# EAGLE board Adc (EAGLE 6.2)
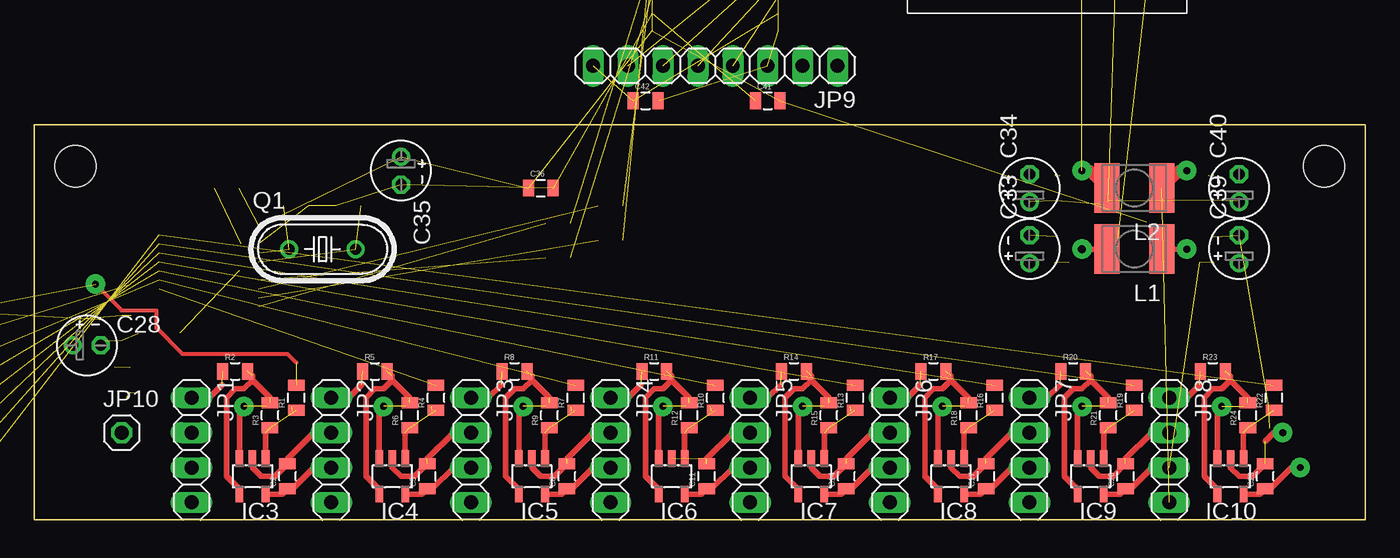
[diagram p0: board, top side]
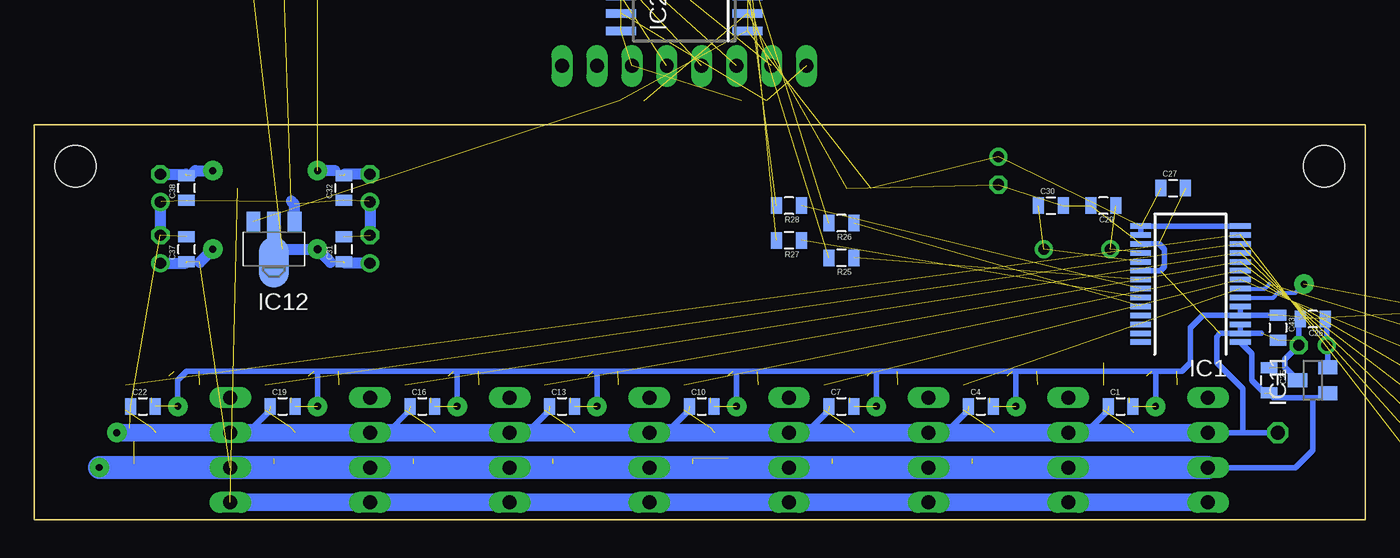
[diagram p1: board, bottom side, seen from below]

Size 96.8 x 28.72 mm. Coordinates in mm from the lower left corner, seen from the top.
Outline: 0,0 96.8,0 96.8,28.72 0,28.72 0,0
Copper layers (1*16): Top 0.035mm / dielectric 1.5mm / Bottom 0.035mm
Design rules: minimum track width 10mil, minimum drill 24mil, track to track 8mil, track to pad 8mil, pad to pad 8mil, via to via 8mil, smd to smd 8mil, copper to edge 40mil, drill to drill 8mil, minimum pad ring 10mil, minimum via ring 8mil, stop-mask expansion 4mil, vias tented up to drill 0mil, thermal gap 10mil
Holes 3 mm at 3,25.72 93.8,25.72

## Footprints (pad centres in the part's own frame; a part is rotated, then mirrored left to right if it is on the bottom)
0805 = smd 0.8 x 1.2: 1 -0.9,0; 2 0.9,0
E2-4 = drill 0.813 pad 1.27: + -1.016,0 | drill 0.813 pad 1.27 octagon: - 1.016,0
TMV0505D = drill 0.6 pad 1.422 long: 1 0,7.62; 2 0,5.08; 5 0,-2.54; 6 0,-5.08; 7 0,-7.62
ADS1256IDBT = smd 0.4 x 1.5: 1 -4.225,-3.625; 2 -3.575,-3.625; 3 -2.925,-3.625; 4 -2.275,-3.625; 5 -1.625,-3.625; 6 -0.975,-3.625; 7 -0.325,-3.625; 8 0.325,-3.625; 9 0.975,-3.625; 10 1.625,-3.625; 11 2.275,-3.625; 12 2.925,-3.625; 13 3.575,-3.625; 14 4.225,-3.625; 15 4.225,3.625; 16 3.575,3.625; 17 2.925,3.625; 18 2.275,3.625; 19 1.625,3.625; 20 0.975,3.625; 21 0.325,3.625; 22 -0.325,3.625; 23 -0.975,3.625; 24 -1.625,3.625; 25 -2.275,3.625; 26 -2.925,3.625; 27 -3.575,3.625; 28 -4.225,3.625
ADUM1402ARWZ = smd 0.6 x 2.2: 1 -4.445,-4.6; 2 -3.175,-4.6; 3 -1.905,-4.6; 4 -0.635,-4.6; 5 0.635,-4.6; 6 1.905,-4.6; 7 3.175,-4.6; 8 4.445,-4.6; 9 4.445,4.6; 10 3.175,4.6; 11 1.905,4.6; 12 0.635,4.6; 13 -0.635,4.6; 14 -1.905,4.6; 15 -3.175,4.6; 16 -4.445,4.6
AD8605ARTZ = smd 0.55 x 1.2: 1 -0.95,-1.3; 2 0,-1.3; 3 0.95,-1.3; 4 0.95,1.3; 5 -0.95,1.3
REF3125AIDBZT = smd 1 x 1.4: 1 -0.95,-1.1; 2 0.95,-1.1; 3 0,1.1
SOT89 = smd 1 x 1.5: 1 -1.499,-1.981; 3 1.499,-1.981 | smd 1 x 2: 2 0,-1.727 | smd 2.2 x 3.7: 2@1 0,0.94
1X04 = drill 1.016 long: 1 -3.81,0; 2 -1.27,0; 3 1.27,0; 4 3.81,0
1X08 = drill 1.016 long: 1 -8.89,0; 2 -6.35,0; 3 -3.81,0; 4 -1.27,0; 5 1.27,0; 6 3.81,0; 7 6.35,0; 8 8.89,0
1X01 = drill 1.016 octagon: 1 0,0
1X02 = drill 1.016 long: 1 -1.27,0; 2 1.27,0
L4532P = smd 1.8 x 3.6: 1 -2,0; 2 2,0
HC49U-V = drill 0.813: 1 -2.413,0; 2 2.413,0

## Placement (x,y rotation side)
C1  100nF  [0805]  17.78,8.26 0 bottom
C2  100nF  [0805]  18.41,3.17 90 top
C3  100nF  [0805]  -6.35,15.24 180 top  (outside the outline)
C4  100nF  [0805]  27.94,8.26 0 bottom
C5  100nF  [0805]  28.57,3.17 90 top
C6  100nF  [0805]  -6.35,13.34 180 top  (outside the outline)
C7  100nF  [0805]  38.1,8.26 0 bottom
C8  100nF  [0805]  38.73,3.17 90 top
C9  100nF  [0805]  -6.35,11.43 180 top  (outside the outline)
C10  100nF  [0805]  48.26,8.26 0 bottom
C11  100nF  [0805]  48.9,3.17 90 top
C12  100nF  [0805]  -6.35,9.53 180 top  (outside the outline)
C13  100nF  [0805]  58.42,8.26 0 bottom
C14  100nF  [0805]  59.05,3.17 90 top
C15  100nF  [0805]  -6.35,7.62 180 top  (outside the outline)
C16  100nF  [0805]  68.58,8.26 0 bottom
C17  100nF  [0805]  69.22,3.17 90 top
C18  100nF  [0805]  -6.35,5.71 180 top  (outside the outline)
C19  100nF  [0805]  78.74,8.26 0 bottom
C20  100nF  [0805]  79.38,3.17 90 top
C21  100nF  [0805]  -6.35,3.81 180 top  (outside the outline)
C22  100nF  [0805]  88.9,8.26 0 bottom
C23  100nF  [0805]  89.53,3.17 90 top
C24  100nF  [0805]  -6.35,1.91 180 top  (outside the outline)
C25  100nF  [0805]  6.99,10.16 270 bottom
C26  100nF  [0805]  3.81,14.61 180 bottom
C27  100nF  [0805]  13.97,24.13 0 bottom
C28  47uF  [E2-4]  3.81,12.7 0 top
C29  18pF  [0805]  19.05,22.86 180 bottom
C30  18pF  [0805]  22.86,22.86 0 bottom
C31  100nF  [0805]  74.3,19.68 90 bottom
C32  100nF  [0805]  74.3,24.13 90 bottom
C33  47uF  [E2-4]  72.39,19.68 90 top
C34  47uF  [E2-4]  72.39,24.13 90 top
C35  47uF  [E2-4]  26.67,25.4 270 top
C36  100nF  [0805]  36.83,24.13 0 top
C37  100nF  [0805]  85.72,19.68 90 bottom
C38  100nF  [0805]  85.72,24.13 90 bottom
C39  47uF  [E2-4]  87.63,19.68 90 top
C40  47uF  [E2-4]  87.63,24.13 90 top
C41  100nF  [0805]  53.34,30.48 0 top
C42  100nF  [0805]  44.45,30.48 0 top
C43  100pF  [0805]  6.35,13.97 270 bottom
G1  TMV0505D  [TMV0505D]  73.66,41.91 90 top  (outside the outline)
IC1  ADS1256IDBT  [ADS1256IDBT]  12.7,17.14 90 bottom
IC2  ADUM1402ARWZ  [ADUM1402ARWZ]  49.53,40.01 90 bottom  (outside the outline)
IC3  AD8605ARTZ  [AD8605ARTZ]  15.88,3.17 180 top
IC4  AD8605ARTZ  [AD8605ARTZ]  26.04,3.17 180 top
IC5  AD8605ARTZ  [AD8605ARTZ]  36.2,3.17 180 top
IC6  AD8605ARTZ  [AD8605ARTZ]  46.35,3.17 180 top
IC7  AD8605ARTZ  [AD8605ARTZ]  56.52,3.17 180 top
IC8  AD8605ARTZ  [AD8605ARTZ]  66.67,3.17 180 top
IC9  AD8605ARTZ  [AD8605ARTZ]  76.83,3.17 180 top
IC10  AD8605ARTZ  [AD8605ARTZ]  87,3.17 180 top
IC11  REF3125AIDBZT  [REF3125AIDBZT]  3.81,10.16 90 bottom
IC12  MCP170333MB  [SOT89]  79.38,19.68 180 bottom
JP1  [1X04]  11.43,5.08 270 top
JP2  [1X04]  21.59,5.08 270 top
JP3  [1X04]  31.75,5.08 270 top
JP4  [1X04]  41.91,5.08 270 top
JP5  [1X04]  52.07,5.08 270 top
JP6  [1X04]  62.23,5.08 270 top
JP7  [1X04]  72.39,5.08 270 top
JP8  [1X04]  82.55,5.08 270 top
JP9  [1X08]  49.53,33.02 180 top  (outside the outline)
JP10  [1X01]  6.35,6.35 0 top
JP11  [1X02]  67.31,45.72 0 top  (outside the outline)
L1  [L4532P]  80.01,19.68 180 top
L2  [L4532P]  80.01,24.13 180 top
Q1  7.68MHz  [HC49U-V]  20.95,19.68 0 top
R1  100  [0805]  19.05,8.89 90 top
R2  1k  [0805]  14.61,10.79 0 top
R3  1k  [0805]  17.14,7.62 90 top
R4  100  [0805]  29.21,8.89 90 top
R5  1k  [0805]  24.77,10.79 0 top
R6  1k  [0805]  27.3,7.62 90 top
R7  100  [0805]  39.37,8.89 90 top
R8  1k  [0805]  34.92,10.79 0 top
R9  1k  [0805]  37.47,7.62 90 top
R10  100  [0805]  49.53,8.89 90 top
R11  1k  [0805]  45.09,10.79 0 top
R12  1k  [0805]  47.62,7.62 90 top
R13  100  [0805]  59.69,8.89 90 top
R14  1k  [0805]  55.24,10.79 0 top
R15  1k  [0805]  57.78,7.62 90 top
R16  100  [0805]  69.85,8.89 90 top
R17  1k  [0805]  65.41,10.79 0 top
R18  1k  [0805]  67.94,7.62 90 top
R19  100  [0805]  80.01,8.89 90 top
R20  1k  [0805]  75.56,10.79 0 top
R21  1k  [0805]  78.11,7.62 90 top
R22  100  [0805]  90.17,8.89 90 top
R23  1k  [0805]  85.72,10.79 0 top
R24  1k  [0805]  88.27,7.62 90 top
R25  100  [0805]  38.1,19.05 180 bottom
R26  100  [0805]  38.1,21.59 180 bottom
R27  100  [0805]  41.91,20.32 180 bottom
R28  100  [0805]  41.91,22.86 180 bottom

## Library data of the parts
C1-C27 C29-C32 C36-C38 C41-C43 R1-R28 = SparkFun-Passives
C28 C33-C35 C39 C40 L1 L2 = rcl
G1 IC1-IC11 = femtoexg
IC12 = linear
JP1-JP11 = pinhead
Q1 = crystal; OC_FARNELL: 1666969; OC_NEWARK: unknown

## Nets
+3.3V: C27.1 C35.+ C36.1 C41.2 IC1.14 IC1.15 IC1.16 IC2.1 IC2.7 IC12.3
+5VA: C2.1 C5.1 C8.1 C11.1 C14.1 C17.1 C20.1 C23.1 C25.2 C37.1 C39.+ IC1.1 IC3.5 IC4.5 IC5.5 IC6.5 IC7.5 IC8.5 IC9.5 IC10.5 IC11.1 JP1.3 JP2.3 JP3.3 JP4.3 JP5.3 JP6.3 JP7.3 JP8.3 L1.1
-5VA: C38.2 C40.- JP1.4 JP2.4 JP3.4 JP4.4 JP5.4 JP6.4 JP7.4 JP8.4 L2.1
GND: C1.1 C2.2 C3.2 C4.1 C5.2 C6.2 C7.1 C8.2 C9.2 C10.1 C11.2 C12.2 C13.1 C14.2 C15.2 C16.1 C17.2 C18.2 C19.1 C20.2 C21.2 C22.1 C23.2 C24.2 C25.1 C26.2 C27.2 C28.- C29.2 C30.2 C31.2 C32.1 C33.- C34.+ C35.- C36.2 C37.2 C38.1 C39.- C40.+ C41.1 C43.2 G1.6 IC1.2 IC1.3 IC1.17 IC1.20 IC2.2 IC2.8 IC3.2 IC4.2 IC5.2 IC6.2 IC7.2 IC8.2 IC9.2 IC10.2 IC11.3 IC12.1 JP1.2 JP2.2 JP3.2 JP4.2 JP5.2 JP6.2 JP7.2 JP8.2 JP10.1
N$1: IC3.4 R2.2 R3.2
N$2: IC3.1 R1.1 R3.1
N$3: JP1.1 R2.1
N$4: C3.1 IC1.6 R1.2
N$5: IC4.4 R5.2 R6.2
N$6: IC4.1 R4.1 R6.1
N$7: C6.1 IC1.7 R4.2
N$8: JP2.1 R5.1
N$9: IC5.4 R8.2 R9.2
N$10: IC5.1 R7.1 R9.1
N$11: C9.1 IC1.8 R7.2
N$12: JP3.1 R8.1
N$13: IC6.4 R11.2 R12.2
N$14: IC6.1 R10.1 R12.1
N$15: C12.1 IC1.9 R10.2
N$16: JP4.1 R11.1
N$17: IC7.4 R14.2 R15.2
N$18: IC7.1 R13.1 R15.1
N$19: C15.1 IC1.10 R13.2
N$20: JP5.1 R14.1
N$21: IC8.4 R17.2 R18.2
N$22: IC8.1 R16.1 R18.1
N$23: C18.1 IC1.11 R16.2
N$24: JP6.1 R17.1
N$25: IC9.4 R20.2 R21.2
N$26: IC9.1 R19.1 R21.1
N$27: C21.1 IC1.12 R19.2
N$28: JP7.1 R20.1
N$29: IC10.4 R23.2 R24.2
N$30: IC10.1 R22.1 R24.1
N$31: C24.1 IC1.13 R22.2
N$32: JP8.1 R23.1
N$33: C29.1 IC1.18 Q1.1
N$34: C30.1 IC1.19 Q1.2
N$35: IC2.11 JP9.7
N$36: IC1.21 R25.1
N$37: IC1.24 R26.1
N$38: IC1.23 R27.1
N$39: IC1.22 R28.1
N$40: C42.1 IC2.9 IC2.15 JP9.8
N$41: C31.1 C33.+ G1.7 IC12.2@1 L1.2
N$42: C32.2 C34.- G1.5 L2.2
N$43: C42.2 IC2.10 IC2.16 JP9.3
N$44: IC2.3 R25.2
N$45: IC2.4 R28.2
N$46: IC2.5 R26.2
N$47: IC2.6 R27.2
N$48: IC2.12 JP9.6
N$49: IC2.13 JP9.5
N$50: IC2.14 JP9.4
N$51: G1.1 JP11.1
N$52: G1.2 JP11.2
REF: C1.2 C4.2 C7.2 C10.2 C13.2 C16.2 C19.2 C22.2 C26.1 C28.+ C43.1 IC1.4 IC1.5 IC3.3 IC4.3 IC5.3 IC6.3 IC7.3 IC8.3 IC9.3 IC10.3 IC11.2

## Tracks (layer width: path | path; a pad name or v marks a point on that pad's centre or on a via)
+3.3V  (7 unrouted)
  Bottom 0.406: IC1.14 IC1.15 IC1.16
+5VA  (via drill 0.5 pad 1.42)  (5 unrouted)
  Top 0.406: v83.82,19.68 L1.1 | IC3.5 18.02,1.88 C2.1 18.79,2.27 20.32,3.81 JP2.3 | IC4.5 28.18,1.88 C5.1 28.95,2.27 30.48,3.81 JP3.3 | IC5.5 38.34,1.88 C8.1 39.1,2.27 40.64,3.81 JP4.3 | IC6.5 48.49,1.88 C11.1 49.27,2.27 50.8,3.81 JP5.3 | IC7.5 58.66,1.88 C14.1 59.42,2.27 60.96,3.81 JP6.3 | IC8.5 68.81,1.88 C17.1 69.58,2.27 71.12,3.81 JP7.3 | IC9.5 78.97,1.88 C20.1 79.75,2.27 81.28,3.81 JP8.3 | IC10.5 89.14,1.88 C23.1 89.91,2.27 91.44,3.81 v92.08,3.81
  Bottom 0.406: IC11.1 2.85,9.21 3.17,8.89 3.81,8.89 | 3.81,8.89 6.67,8.89 | 7.3,9.21 8.26,10.16 8.26,12.1 IC1.1 | JP1.3 5.08,3.81 3.81,5.08 3.81,8.89
  Bottom 0.813: 84.77,18.73 v83.82,19.68 | C39.+ 85.79,18.67
  Bottom 1.676: JP1.3 JP2.3 JP3.3 JP4.3 JP5.3 JP6.3 JP7.3 JP8.3 v92.08,3.81
-5VA  (via drill 0.5 pad 1.42)  (3 unrouted)
  Top 0.813: v83.82,25.4 83.28,25.4 L2.1
  Bottom 0.813: C40.- 85.79,25.15 | 85.41,25.08 85.09,25.4 v83.82,25.4
  Bottom 1.27: JP1.4 JP2.4 JP3.4 JP4.4 JP5.4 JP6.4 JP7.4 JP8.4
GND  (via drill 0.5 pad 1.42)  (45 unrouted)
  Top 0.406: 28.57,4.45 30.48,6.35 JP3.2 | 38.73,4.45 40.64,6.35 JP4.2 | 48.9,4.45 50.8,6.35 JP5.2 | 59.05,4.45 60.96,6.35 JP6.2 | 69.22,4.45 71.12,6.35 JP7.2 | 79.38,4.45 81.28,6.35 JP8.2 | v90.81,6.35 90.17,6.35 89.53,5.71 | IC3.2 15.88,3.81 16.51,3.17 17.52,3.17 C2.2 18.41,4.45 20.32,6.35 JP2.2 | IC4.2 26.04,3.81 26.67,3.17 27.68,3.17 C5.2 | IC5.2 36.2,3.81 36.83,3.17 37.84,3.17 C8.2 | IC7.2 56.52,3.81 57.15,3.17 58.16,3.17 C14.2 | IC8.2 66.67,3.81 67.31,3.17 68.31,3.17 C17.2 | IC9.2 76.83,3.81 77.47,3.17 78.47,3.17 C20.2 | IC10.2 87,3.81 87.63,3.17 88.64,3.17 C23.2
  Bottom 0.406: 18.73,7.94 20.32,6.35 | 28.89,7.94 30.48,6.35 | 39.05,7.94 40.64,6.35 | 49.21,7.94 50.8,6.35 | 59.37,7.94 60.96,6.35 | 69.53,7.94 71.12,6.35 | 79.69,7.94 81.28,6.35 | 89.85,6.67 90.17,6.35 | IC1.2 IC1.3 | IC1.17 14.99,20.07 14.61,19.68 14.61,18.41 14.9,18.12 IC1.20 | IC11.3 5.86,11.11 5.86,11.67 C28.- | C28.- 4.83,14.54 | 5.15,13.02 C28.- | JP1.2 8.89,6.35 | 8.89,6.35 8.89,9.53 10.79,11.43 10.79,13.34 10.56,13.57 IC1.2 | IC1.2 7.54,13.57 | 8.89,6.35 JP10.1
  Bottom 0.813: C39.- C40.+ 87.56,23.18 | C33.- C34.+ 72.46,23.18 | IC12.1 77.88,22.95 78.11,23.18
  Bottom 1.27: JP1.2 20.32,6.35 JP2.2 30.48,6.35 JP3.2 40.64,6.35 JP4.2 50.8,6.35 JP5.2 60.96,6.35 JP6.2 71.12,6.35 JP7.2 81.28,6.35 JP8.2 90.17,6.35 v90.81,6.35
N$1  (2 unrouted)
  Top 0.406: IC3.4 14.93,2.22 13.97,3.17 13.97,8.89 14.61,9.53 15.24,9.53 15.88,10.16 | 15.88,10.16 15.88,10.47 | 17.14,8.89 15.88,10.16
N$2  (2 unrouted)
  Top 0.406: IC3.1 16.82,6.35
N$3  (1 unrouted)
  Top 0.406: 13.65,9.85 12.7,8.89 JP1.1
N$4  (via drill 0.5 pad 1.42)  (2 unrouted)
  Top 0.305: 19.05,11.43 18.41,12.06 10.79,12.06 8.89,13.97 8.89,15.24 6.35,15.24 v4.45,17.14
  Bottom 0.305: IC1.6 6.69,16.17 6.35,16.51 5.08,16.51 v4.45,17.14
N$5  (2 unrouted)
  Top 0.406: IC4.4 25.09,2.22 24.13,3.17 24.13,8.89 24.77,9.53 25.4,9.53 26.04,10.16 | 26.04,10.16 26.04,10.47 | 27.3,8.89 26.04,10.16
N$6  (2 unrouted)
  Top 0.406: IC4.1 26.98,6.35
N$7  (2 unrouted)
  Bottom 0.305: IC1.7 7.31,16.82 6.99,17.14
N$8  (1 unrouted)
  Top 0.406: 23.82,9.85 22.86,8.89 JP2.1
N$9  (2 unrouted)
  Top 0.406: IC5.4 35.24,2.22 34.29,3.17 34.29,8.89 34.92,9.53 35.56,9.53 36.2,10.16 | 36.2,10.16 36.2,10.47 | 37.47,8.89 36.2,10.16
N$10  (2 unrouted)
  Top 0.406: IC5.1 37.15,6.35
N$11  (2 unrouted)
N$12  (1 unrouted)
  Top 0.406: 33.98,9.85 33.02,8.89 JP3.1
N$13  (2 unrouted)
  Top 0.406: IC6.4 45.41,2.22 44.45,3.17 44.45,8.89 45.09,9.53 45.72,9.53 46.35,10.16 | 46.35,10.16 46.35,10.47 | 47.62,8.89 46.35,10.16
N$14  (2 unrouted)
  Top 0.406: IC6.1 47.3,6.35
N$15  (2 unrouted)
N$16  (1 unrouted)
  Top 0.406: 44.13,9.85 43.18,8.89 JP4.1
N$17  (2 unrouted)
  Top 0.406: IC7.4 55.56,2.22 54.61,3.17 54.61,8.89 55.24,9.53 55.88,9.53 56.52,10.16 | 56.52,10.16 56.52,10.47 | 57.78,8.89 56.52,10.16
N$18  (2 unrouted)
  Top 0.406: IC7.1 57.47,6.35
N$19  (2 unrouted)
N$20  (1 unrouted)
  Top 0.406: 54.3,9.85 53.34,8.89 JP5.1
N$21  (2 unrouted)
  Top 0.406: IC8.4 65.72,2.22 64.77,3.17 64.77,8.89 65.41,9.53 66.04,9.53 66.67,10.16 | 66.67,10.16 66.67,10.47 | 67.94,8.89 66.67,10.16
N$22  (2 unrouted)
  Top 0.406: IC8.1 67.62,6.35
N$23  (2 unrouted)
N$24  (1 unrouted)
  Top 0.406: 64.45,9.85 63.5,8.89 JP6.1
N$25  (2 unrouted)
  Top 0.406: IC9.4 75.89,2.22 74.93,3.17 74.93,8.89 75.56,9.53 76.2,9.53 76.83,10.16 | 76.83,10.16 76.83,10.47 | 78.11,8.89 76.83,10.16
N$26  (2 unrouted)
  Top 0.406: IC9.1 77.78,6.35
N$27  (2 unrouted)
N$28  (1 unrouted)
  Top 0.406: 74.61,9.85 73.66,8.89 JP7.1
N$29  (2 unrouted)
  Top 0.406: IC10.4 86.05,2.22 85.09,3.17 85.09,8.89 85.72,9.53 86.36,9.53 87,10.16 | 87,10.16 87,10.47 | 88.27,8.89 87,10.16
N$30  (2 unrouted)
  Top 0.406: IC10.1 87.94,6.35
N$31  (2 unrouted)
N$32  (1 unrouted)
  Top 0.406: 84.78,9.85 83.82,8.89 JP8.1
N$33  (2 unrouted)
N$34  (2 unrouted)
N$35  (1 unrouted)
N$36  (1 unrouted)
N$37  (1 unrouted)
N$38  (1 unrouted)
N$39  (1 unrouted)
N$40  (3 unrouted)
N$41  (via drill 0.6 pad 1.42)  (3 unrouted)
  Top 0.406: v76.2,19.68 L1.2
  Bottom 0.813: 75.25,18.73 v76.2,19.68 78.74,19.68 79.38,19.05 IC12.2@1 | C33.+ 74.23,18.67
N$42  (via drill 0.5 pad 1.42)  (3 unrouted)
  Top 0.813: v76.2,25.4 76.74,25.4 L2.2
  Bottom 0.406: 74.61,25.08 74.93,25.4
  Bottom 0.813: C34.- 74.23,25.15 | 74.93,25.4 v76.2,25.4
N$43  (3 unrouted)
N$44  (1 unrouted)
N$45  (1 unrouted)
N$46  (1 unrouted)
N$47  (1 unrouted)
N$48  (1 unrouted)
N$49  (1 unrouted)
N$50  (1 unrouted)
N$51  (1 unrouted)
N$52  (1 unrouted)
REF  (via drill 0.5 pad 1.42)  (11 unrouted)
  Top 0.406: IC3.3 14.93,7.94 v15.24,8.26 | IC4.3 25.09,7.94 v25.4,8.26 | IC5.3 35.24,7.94 v35.56,8.26 | IC6.3 45.41,7.94 v45.72,8.26 | IC7.3 55.56,7.94 v55.88,8.26 | IC8.3 65.72,7.94 v66.04,8.26 | IC9.3 75.89,7.94 v76.2,8.26 | IC10.3 86.05,7.94 v86.36,8.26
  Bottom 0.406: 15.24,10.79 25.4,10.79 | 25.4,10.79 35.56,10.79 | 35.56,10.79 45.72,10.79 | 45.72,10.79 55.88,10.79 | 55.88,10.79 66.04,10.79 | 66.04,10.79 76.2,10.79 | 76.2,10.79 85.72,10.79 86.36,10.16 v86.36,8.26 | v25.4,8.26 25.4,10.79 | v35.56,8.26 35.56,10.79 | 15.24,10.79 v15.24,8.26 | v45.72,8.26 45.72,10.79 | v55.88,8.26 55.88,10.79 | v66.04,8.26 66.04,10.79 | v76.2,8.26 76.2,10.79 | IC1.5 IC1.4 | IC11.2 2.71,12.62 C28.+ 2.79,14.54 | IC1.4 11.8,14.87 12.7,13.97 12.7,11.43 13.34,10.79 15.24,10.79 | IC1.4 7.04,14.87